# Altium PCB PCB1.PcbDoc
Units mil, origin at the board's own origin, x right, y up, seen from the top; angles counter-clockwise.
Board outline 6000 x 4000 mil, 2 copper layers (Top Layer, Bottom Layer); 18 components, 27 nets, 198 pads, 0 vias.
Unrouted connection lines stored in the file: 84.
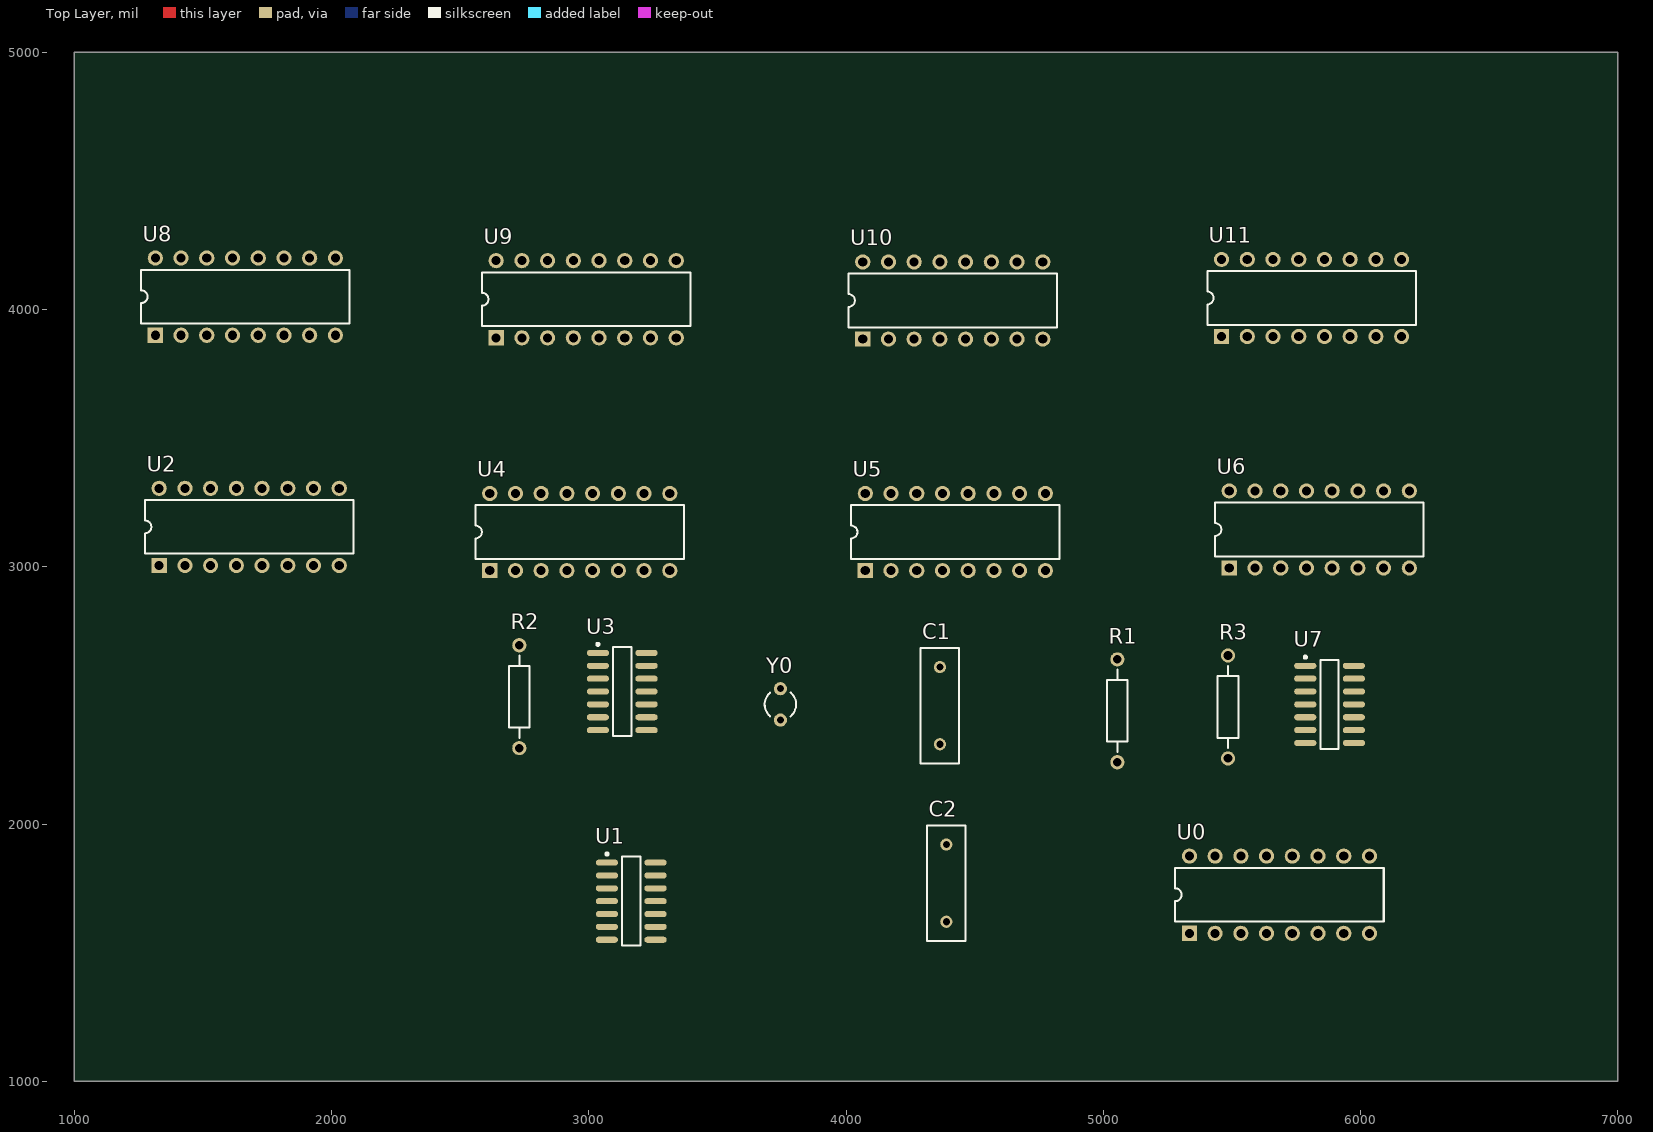
[diagram p0: Top Layer view]
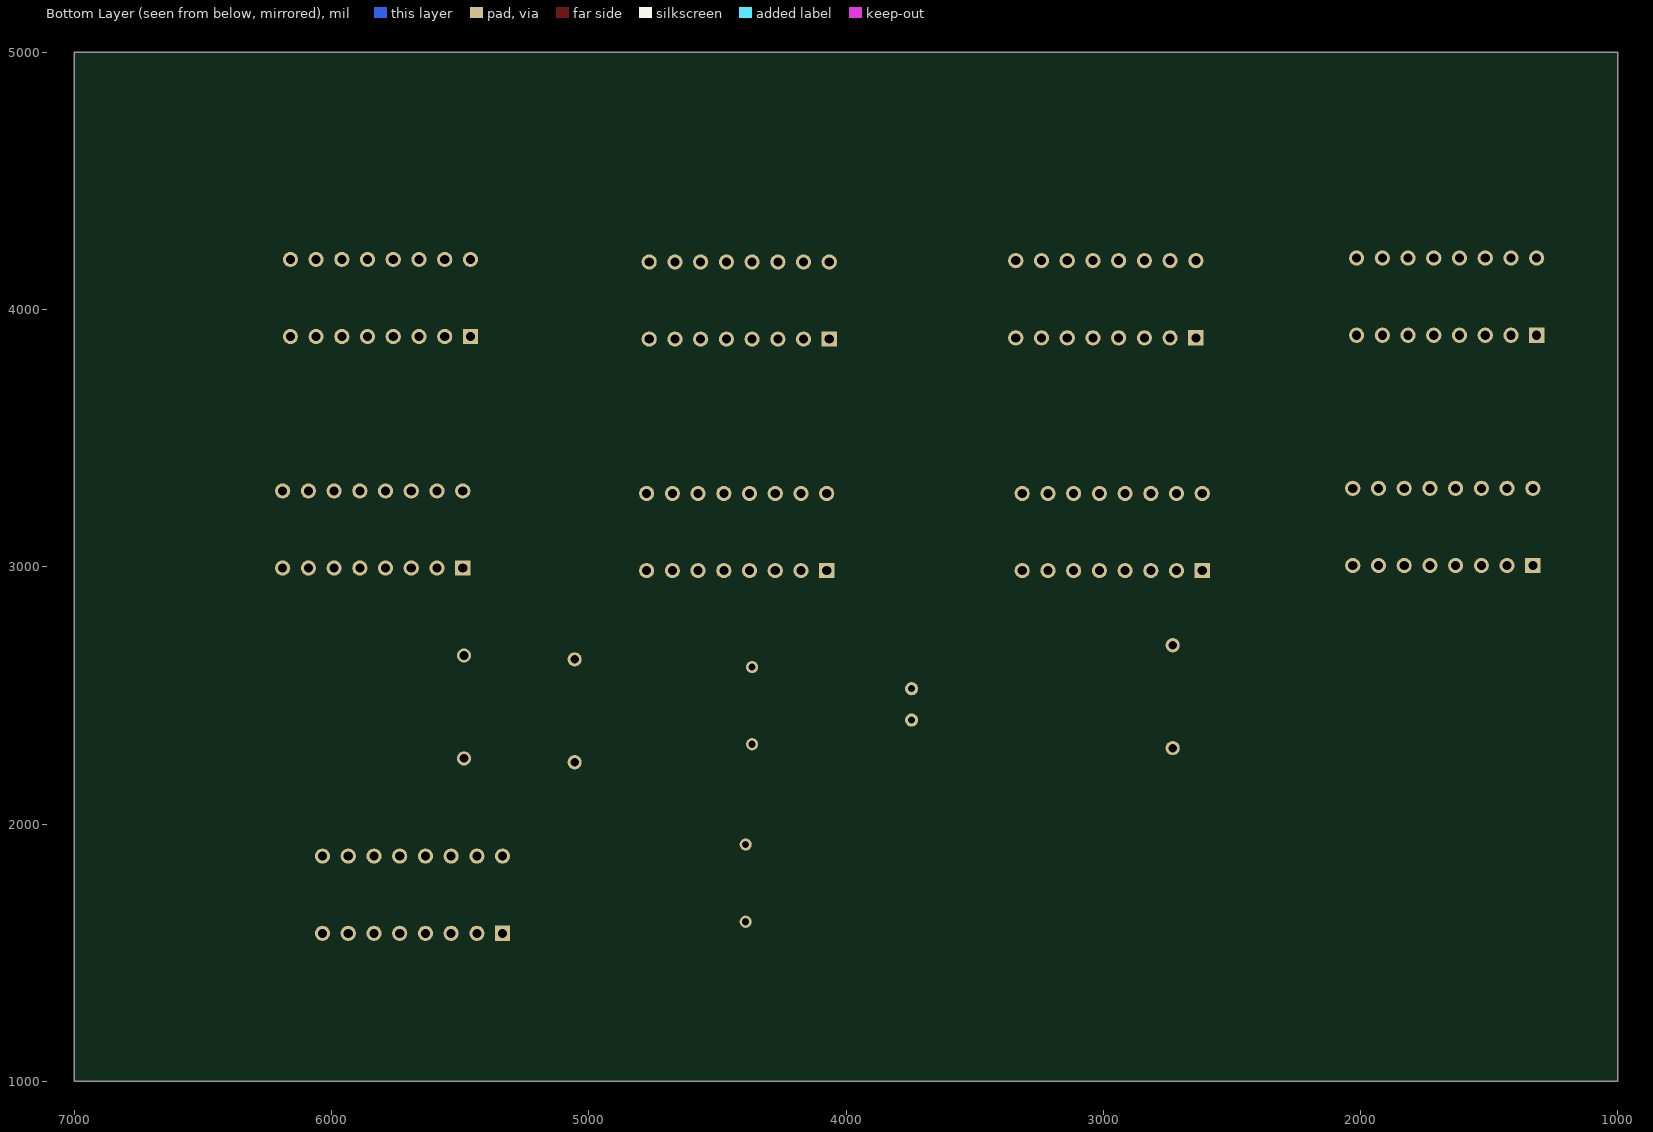
[diagram p1: Bottom Layer view, seen from below]

## Layer stack, top to bottom
Top Layer: signal copper 1.4
Dielectric: dielectric 12.6, FR-4, Dk 4.8
Bottom Layer: signal copper 1.4

## Board outline
1000,1000 7000,1000 7000,5000 1000,5000

## Design rules (kind name [scope] priority, off if disabled: settings)
Clearance [All] p1: gap=10
PolygonConnect [All] p1: connectstyle=Relief reliefconductorwidth=10 reliefentries=4 polygonreliefangle="90 Angle" airgapwidth=10
RoutingVias [All] p1: holewidth=28 width=50 viastyle="Through Hole" minholewidth=28 minwidth=50 maxholewidth=28 maxwidth=50
SolderMaskExpansion [All] p1: expansion=4
Width [All] p1: maxlimit=10 minlimit=10 preferedwidth=10
28 further rules are at their usual default settings.

## Classes and differential pairs
component class 原理总图: U1 U8 U9 U10 U11

## Components (designator, comment, footprint, x,y, rotation, side; value= is the part's Value field where it differs from the comment)
C1 "Cap" RAD-0.3 4365,2460 r90 top
C2 "Cap" RAD-0.3 4390,1770 r90 top
R1 "Res2" AXIAL-0.4 5055,2440 r90 top
R2 "Res2" AXIAL-0.4 2730,2495 r90 top
R3 "Res2" AXIAL-0.4 5485,2455 r90 top
U0 "CD4060BCN" N16E 5685,1725 r0 top
U1 "CD4013BCM" M14A_N 3165,1700 r0 top
U2 "CD4029BMJ" J16A 1680,3155 r0 top
U3 "CD4081BCM" M14A_N 3130,2515 r0 top
U4 "CD4029BMJ" J16A 2965,3135 r0 top
U5 "CD4029BMJ" J16A 4425,3135 r0 top
U6 "CD4029BMJ" J16A 5840,3145 r0 top
U7 "CD4081BCM" M14A_N 5880,2465 r0 top
U8 "74LS47" DIP-16 1665,4050 r0 top
U9 "74LS47" DIP-16 2990,4040 r0 top
U10 "74LS47" DIP-16 4415,4035 r0 top
U11 "74LS47" DIP-16 5810,4045 r0 top
Y0 "XTAL" R38 3745,2465 r0 top

## Footprints (in the part's own frame and the unit in brackets; to place one, negate y for a bottom-side part, rotate by r counter-clockwise, add the part's x,y. Pads: shape width x height; smd on the part's side, far side on the other; paste and mask are expansions set on the pad)
AXIAL-0.4 [mm] "Resistor; 2 Leads"
  round 1.4 hole 0.85: 1(-5.08,0) 2(5.08,0)
  silkscreen extent -4.06,-1.02 4.06,1.02
DIP-16 [mm] "DIP; 16 Leads; Row Spacing 7.62 mm; Pitch 2.54 mm"
  rect 1.5x1.5 hole 0.9: 1(-8.89,-3.81)
  round 1.5 hole 0.9: 2(-6.35,-3.81) 3(-3.81,-3.81) 4(-1.27,-3.81) 5(1.27,-3.81) 6(3.81,-3.81) 7(6.35,-3.81) 8(8.89,-3.81) 9(8.89,3.81) 10(6.35,3.81) 11(3.81,3.81) 12(1.27,3.81) 13(-1.27,3.81) 14(-3.81,3.81) 15(-6.35,3.81) 16(-8.89,3.81)
  silkscreen extent -10.3,-2.65 10.3,2.65
J16A [mm] "DIP; 16 Leads; Row Spacing 7.62 mm; Pitch 2.54 mm"
  rect 1.5x1.5 hole 0.9: 1(-8.89,-3.81)
  round 1.5 hole 0.9: 2(-6.35,-3.81) 3(-3.81,-3.81) 4(-1.27,-3.81) 5(1.27,-3.81) 6(3.81,-3.81) 7(6.35,-3.81) 8(8.89,-3.81) 9(8.89,3.81) 10(6.35,3.81) 11(3.81,3.81) 12(1.27,3.81) 13(-1.27,3.81) 14(-3.81,3.81) 15(-6.35,3.81) 16(-8.89,3.81)
  silkscreen extent -10.3,-2.65 10.3,2.65
M14A_N [mm] "SOIC, 14-Leads, Body 8.6x3.9mm, Pitch 1.27mm, IPC Medium Density"
  oval 2.2x0.6 smd: 1(-2.4,3.81) 2(-2.4,2.54) 3(-2.4,1.27) 4(-2.4,0) 5(-2.4,-1.27) 6(-2.4,-2.54) 7(-2.4,-3.81) 8(2.4,-3.81) 9(2.4,-2.54) 10(2.4,-1.27) 11(2.4,0) 12(2.4,1.27) 13(2.4,2.54) 14(2.4,3.81)
  silkscreen extent -2.52,-4.4 0.9,4.78, body extent -2,-4.38 2,4.38, height 1.75
N16E [mm] "DIP; 16 Leads; Row Spacing 7.62 mm; Pitch 2.54 mm"
  rect 1.5x1.5 hole 0.9: 1(-8.89,-3.81)
  round 1.5 hole 0.9: 2(-6.35,-3.81) 3(-3.81,-3.81) 4(-1.27,-3.81) 5(1.27,-3.81) 6(3.81,-3.81) 7(6.35,-3.81) 8(8.89,-3.81) 9(8.89,3.81) 10(6.35,3.81) 11(3.81,3.81) 12(1.27,3.81) 13(-1.27,3.81) 14(-3.81,3.81) 15(-6.35,3.81) 16(-8.89,3.81)
  silkscreen extent -10.3,-2.65 10.3,2.65
R38 [mm] "Crystal, Thru-Hole; 2 Leads; Body 3.1 x 8.2 mm (Dia.xH)"
  round 1.3 hole 0.7: 1(0,1.55) 2(0,-1.55)
  silkscreen extent -1.55,-1.19 1.55,1.17
RAD-0.3 [mm] "Capacitor; 2 Leads"
  round 1.2 hole 0.7: 1(-3.81,0) 2(3.81,0)
  silkscreen extent -5.71,-1.91 5.71,1.91

## Part data
C1 C2: "Capacitor"
R1 R2 R3: "Resistor"
U0: "14-Stage Ripple Carry Binary Counter"
U1: "Dual D-Type Flip-Flop"
U2 U4 U5 U6: "Binary/Decade Up/Down Counter"
U3 U7: "Quad 2-Input AND Buffered B series Gate, 14-Pin SOIC"
Y0: "Crystal Oscillator"

## Nets (pads, with @x,y where several pads share a name; then routed paths per layer and width w, separated by ;. In a path a pad name is that pad's centre, name@x,y a point inside that pad or via, vN(x,y) a via of type N, cw(c..) or ccw(c..) an arc to the next point about the centre after c; other vN are vias at no path point)
+5: U2.10 U4.10 U5.10 U6.10
GND: C1.1 C1.2 C2.1 C2.2 R1.1 R1.2 R2.1 R3.1 U0.8 U0.10 U0.11 U0.12 U1.7 U2.3 U2.4 U2.5 U2.9 U2.12 U2.13 U3.7 U4.3 U4.4 U4.9 U4.12 U4.13 U5.3 U5.4 U5.5 U5.9 U5.12 U5.13 U6.3 U6.4 U6.9 U6.12 U6.13 U7.7 U8.8 U9.8 U10.8 U11.8 Y0.1 Y0.2
NetR2_2: R2.2 U2.1 U3.3 U4.1 U5.15 U6.15
NetR3_2: R3.2 U5.1 U6.1 U7.10
NetU0_3: U0.3 U1.3
NetU1_1: U1.1 U2.15 U4.15
NetU1_2: U1.2 U1.5
NetU2_2: U2.2 U8.6
NetU2_6: U2.6 U8.7
NetU2_7: U2.7 U4.5
NetU2_11: U2.11 U8.1
NetU2_14: U2.14 U8.2
NetU3_1: U3.1 U4.6 U9.7
NetU3_2: U3.2 U4.11 U9.1
NetU4_2: U4.2 U9.6
NetU4_14: U4.14 U9.2
NetU5_2: U5.2 U10.6
NetU5_6: U5.6 U10.7
NetU5_7: U5.7 U6.5
NetU5_11: U5.11 U7.9 U10.1
NetU5_14: U5.14 U10.2
NetU6_2: U6.2 U11.6
NetU6_6: U6.6 U7.8 U11.7
NetU6_11: U6.11 U11.1
NetU6_14: U6.14 U11.2
VCC: U8.16 U9.16 U10.16 U11.16
VDD: U1.14 U3.14 U7.14
pads on no net: U0.1 U0.2 U0.4 U0.5 U0.6 U0.7 U0.9 U0.13 U0.14 U0.15 U0.16 U1.4 U1.6 U1.8 U1.9 U1.10 U1.11 U1.12 U1.13 U2.8 U2.16 U3.4 U3.5 U3.6 U3.8 U3.9 U3.10 U3.11 U3.12 U3.13 U4.7 U4.8 U4.16 U5.8 U5.16 U6.7 U6.8 U6.16 U7.1 U7.2 U7.3 U7.4 U7.5 U7.6 U7.11 U7.12 U7.13 U8.3 U8.4 U8.5 U8.9 U8.10 U8.11 U8.12 U8.13 U8.14 U8.15 U9.3 U9.4 U9.5 U9.9 U9.10 U9.11 U9.12 U9.13 U9.14 U9.15 U10.3 U10.4 U10.5 U10.9 U10.10 U10.11 U10.12 U10.13 U10.14 U10.15 U11.3 U11.4 U11.5 U11.9 U11.10 U11.11 U11.12 U11.13 U11.14 U11.15